# Altium PCB PCB1.PcbDoc
Units mil, origin at the board's own origin, x right, y up, seen from the top; angles counter-clockwise.
Board outline 6000 x 4000 mil, 2 copper layers (Top Layer, Bottom Layer); 7 components, 4 nets, 16 pads, 0 vias.
Unrouted connection lines stored in the file: 12.
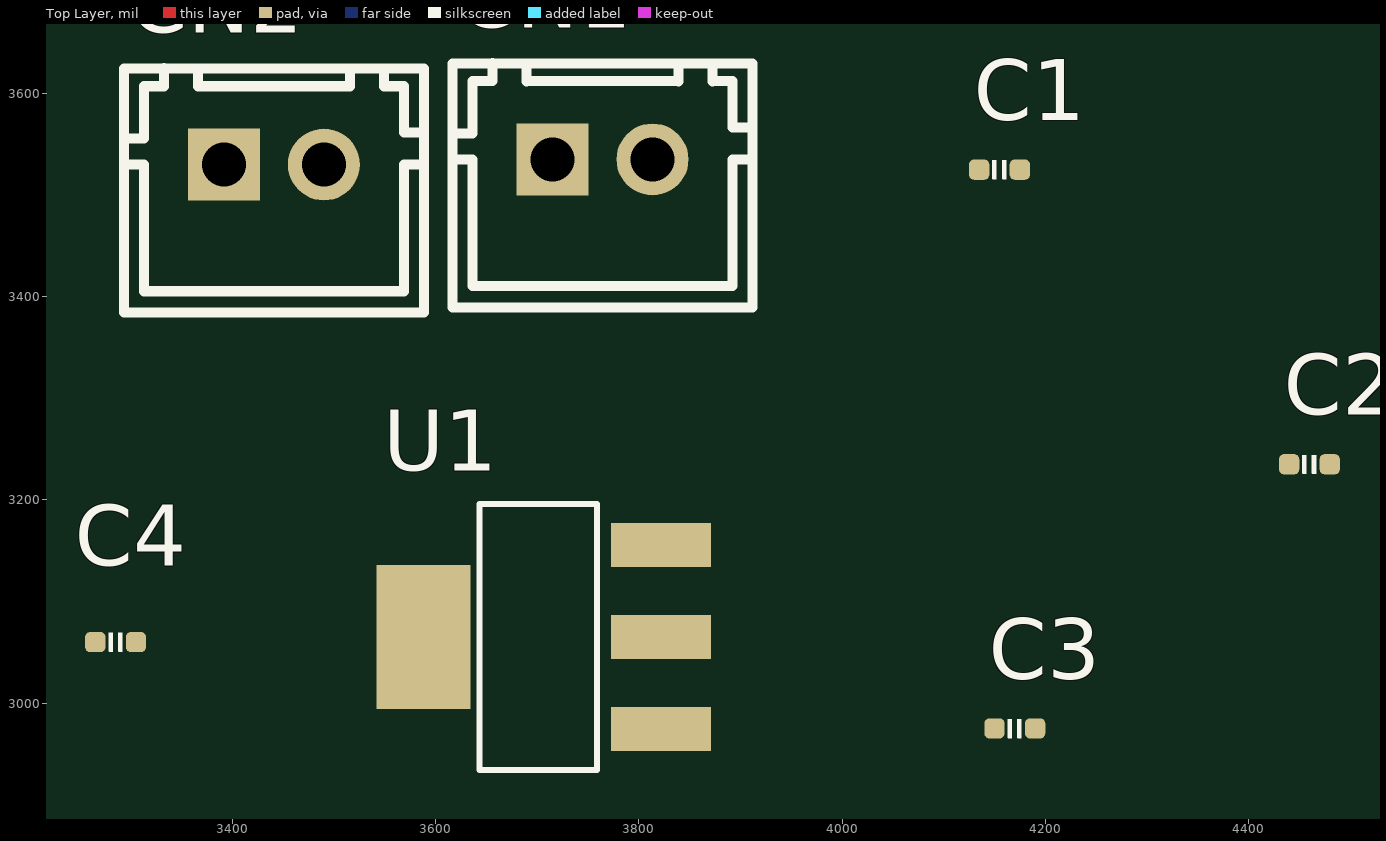
[diagram p0: Top Layer view]
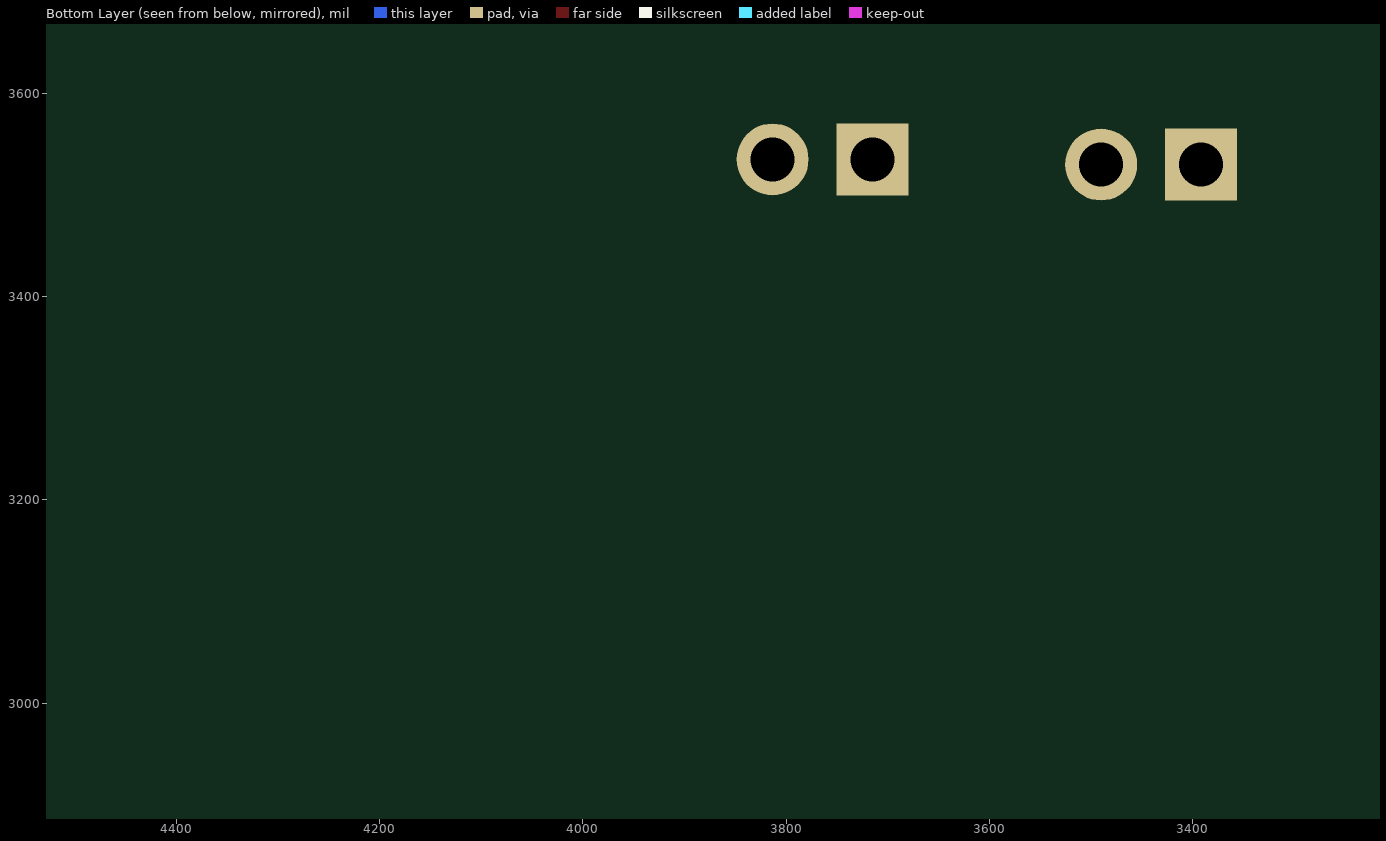
[diagram p1: Bottom Layer view, seen from below]

## Layer stack, top to bottom
Top Solder: solder mask 0.4, Solder Resist, Dk 3.5
Top Layer: signal copper 1.4
Dielectric 1: dielectric 12.6, FR-4, Dk 4.8
Bottom Layer: signal copper 1.4
Bottom Solder: solder mask 0.4, Solder Resist, Dk 3.5

## Board outline
1000,1000 7000,1000 7000,5000 1000,5000

## Design rules (kind name [scope] priority, off if disabled: settings)
Clearance [All] p1: gap=10 ignorepadtopadclearanceinfootprint=FALSE except(0: Arc-Hole Track-Hole SMDPad-Hole THPad-Hole Via-Hole Fill-Hole Poly-Hole Region-Hole Text-Hole)
PolygonConnect [All] p1: connectstyle=Relief reliefconductorwidth=10 reliefentries=4 polygonreliefangle="90 Angle" airgapwidth=10
RoomDefinition Sheet1 [InComponentClass('Sheet1')] p1: confinementstyle=ConfineIn formatcopy=TRUE lockcomponents=FALSE outline 7210,1020 8960,1020 8960,1400 7210,1400
RoutingVias [All] p1: holewidth=28 width=50 viastyle="Through Hole" minholewidth=28 minwidth=50 maxholewidth=28 maxwidth=50
SolderMaskExpansion [All] p1: expansion=4 istentingtop=FALSE
Width [All] p1: maxlimit=10 minlimit=10 preferedwidth=10
30 further rules are at their usual default settings.

## Components (designator, comment, footprint, x,y, rotation, side; value= is the part's Value field where it differs from the comment)
C1 "C0402" CAP_0402 4155,3525 r0 top value=10uF
C2 "C0402" CAP_0402 4460,3235 r0 top value=0.1uF
C3 "C0402" CAP_0402 4170,2975 r0 top value=10uF
C4 "C0402" CAP_0402 3285,3060 r0 top value=0.1uF
CN1 "ZX-XH2.54-2PZZ" CONN-TH_2P-P2.50_HX25003-2A 3764.21,3535 r0 top
CN2 "ZX-XH2.54-2PZZ" CONN-TH_2P-P2.50_HX25003-2A 3440.79,3530 r0 top
U1 "AMS1117-3.3(XBLW)" SOT-223-3_L6.5-W3.4-P2.30-LS7.0-BR-1 3705,3065 r0 top

## Footprints (in the part's own frame and the unit in brackets; to place one, negate y for a bottom-side part, rotate by r counter-clockwise, add the part's x,y. Pads: shape width x height; smd on the part's side, far side on the other; paste and mask are expansions set on the pad)
CAP_0402 [mil]
  rrect50% 20x20 smd: 1(-20,0) 2(20,0)
  silkscreen extent -6,-9 6,9, body extent -20,-10 20,10, height 20
CONN-TH_2P-P2.50_HX25003-2A [mm]
  rect 1.8x1.8 hole 1.1 paste+0 mask+0.05: 1(-1.25,0)
  round 1.8 hole 1.1 paste+0 mask+0.05: 2(1.25,0)
  silkscreen extent -3.75,-3.7 3.75,2.41
SOT-223-3_L6.5-W3.4-P2.30-LS7.0-BR-1 [mm]
  rect 2.5x1.1 smd: 1(2.97,-2.3) 2(2.97,0) 3(2.97,2.3)
  rect 2.34x3.6 smd: 2(-2.97,0)
  silkscreen extent -1.57,-3.33 1.37,3.33

## Part data
C1 C2 C3 C4: library part Cap_0402, "Capacitor", Note=±10%, Specification="X7R, ±10%, 16V", Type=0402
CN1 CN2: Current Rating (Max)=3A, JLCPCB Part Class="Extended Part", Manufacturer=Megastar(兆星), Operating Temperature Range=-25℃~+85℃, Add into BOM=yes, Contact Material=黄铜, Contact Plating=锡, Convert to PCB=yes, Datasheet=https://atta.szlcsc.com/upload/public/pdf/source/20230619/19BA6947230AA44A04D3EDD65E618FD0.pdf, Device=ZX-XH2.54-2PZZ, LCSC Part Name=ZX-XH2.54-2PZZ, Manufacturer Part=ZX-XH2.54-2PZZ, Mounting Style=直插, Name=ZX-XH2.54-2PZZ, Number of Pins=2P, Number of PINs Per Row=2, Number of Rows=1, Pins Structure=1x2P, Pitch=2.54mm, Reference Series=XH, Row Spacing=-, Supplier=LCSC, Supplier Footprint=插件,P=2.54mm, Supplier Part=C7429632, Symbol=ZX-XH2.54-2PZZ
U1: library part AMS1117-3.3(XBLW)_C18906017, JLCPCB Part Class="Extended Part", Manufacturer=XBLW(芯伯乐), MAX Output Current=1A, Maximum Input Voltage=15V, Operating Temperature=-40℃~+125℃, Output Voltage=3.3V, Power Supply Rejection Ratio (PSRR)=60dB, standby current=4mA, Add into BOM=yes, Convert to PCB=yes, Datasheet=https://atta.szlcsc.com/upload/public/pdf/source/20231019/F4230EEFC48908FC91962BB59ACA9AD6.pdf, Device=AMS1117-3.3(XBLW)_C18906017, LCSC Part Name=AMS1117-3.3(XBLW), Manufacturer Part=AMS1117-3.3(XBLW), Name=AMS1117-3.3(XBLW), Number of Outputs=1, Supplier=LCSC, Supplier Footprint=SOT-223, Supplier Part=C18906017, Symbol=AMS1117-3.3(XBLW)_C18906017

## Nets (pads, with @x,y where several pads share a name; then routed paths per layer and width w, separated by ;. In a path a pad name is that pad's centre, name@x,y a point inside that pad or via, vN(x,y) a via of type N, cw(c..) or ccw(c..) an arc to the next point about the centre after c; other vN are vias at no path point)
GND: C1.1 C2.1 C3.1 C4.1 U1.1
NetC1_2: C1.2 C2.2 CN1.2 U1.3
NetC3_2: C3.2 C4.2 CN2.1 U1.2
VCC: CN1.1 CN2.2